# Altium PCB S24.pcbdoc
Units mil, origin at the board's own origin, x right, y up, seen from the top; angles counter-clockwise.
Board outline 2019.84 x 1784.84 mil, 2 copper layers (Top Layer, Bottom Layer); 2 components, 5 nets, 65 pads, 0 vias.
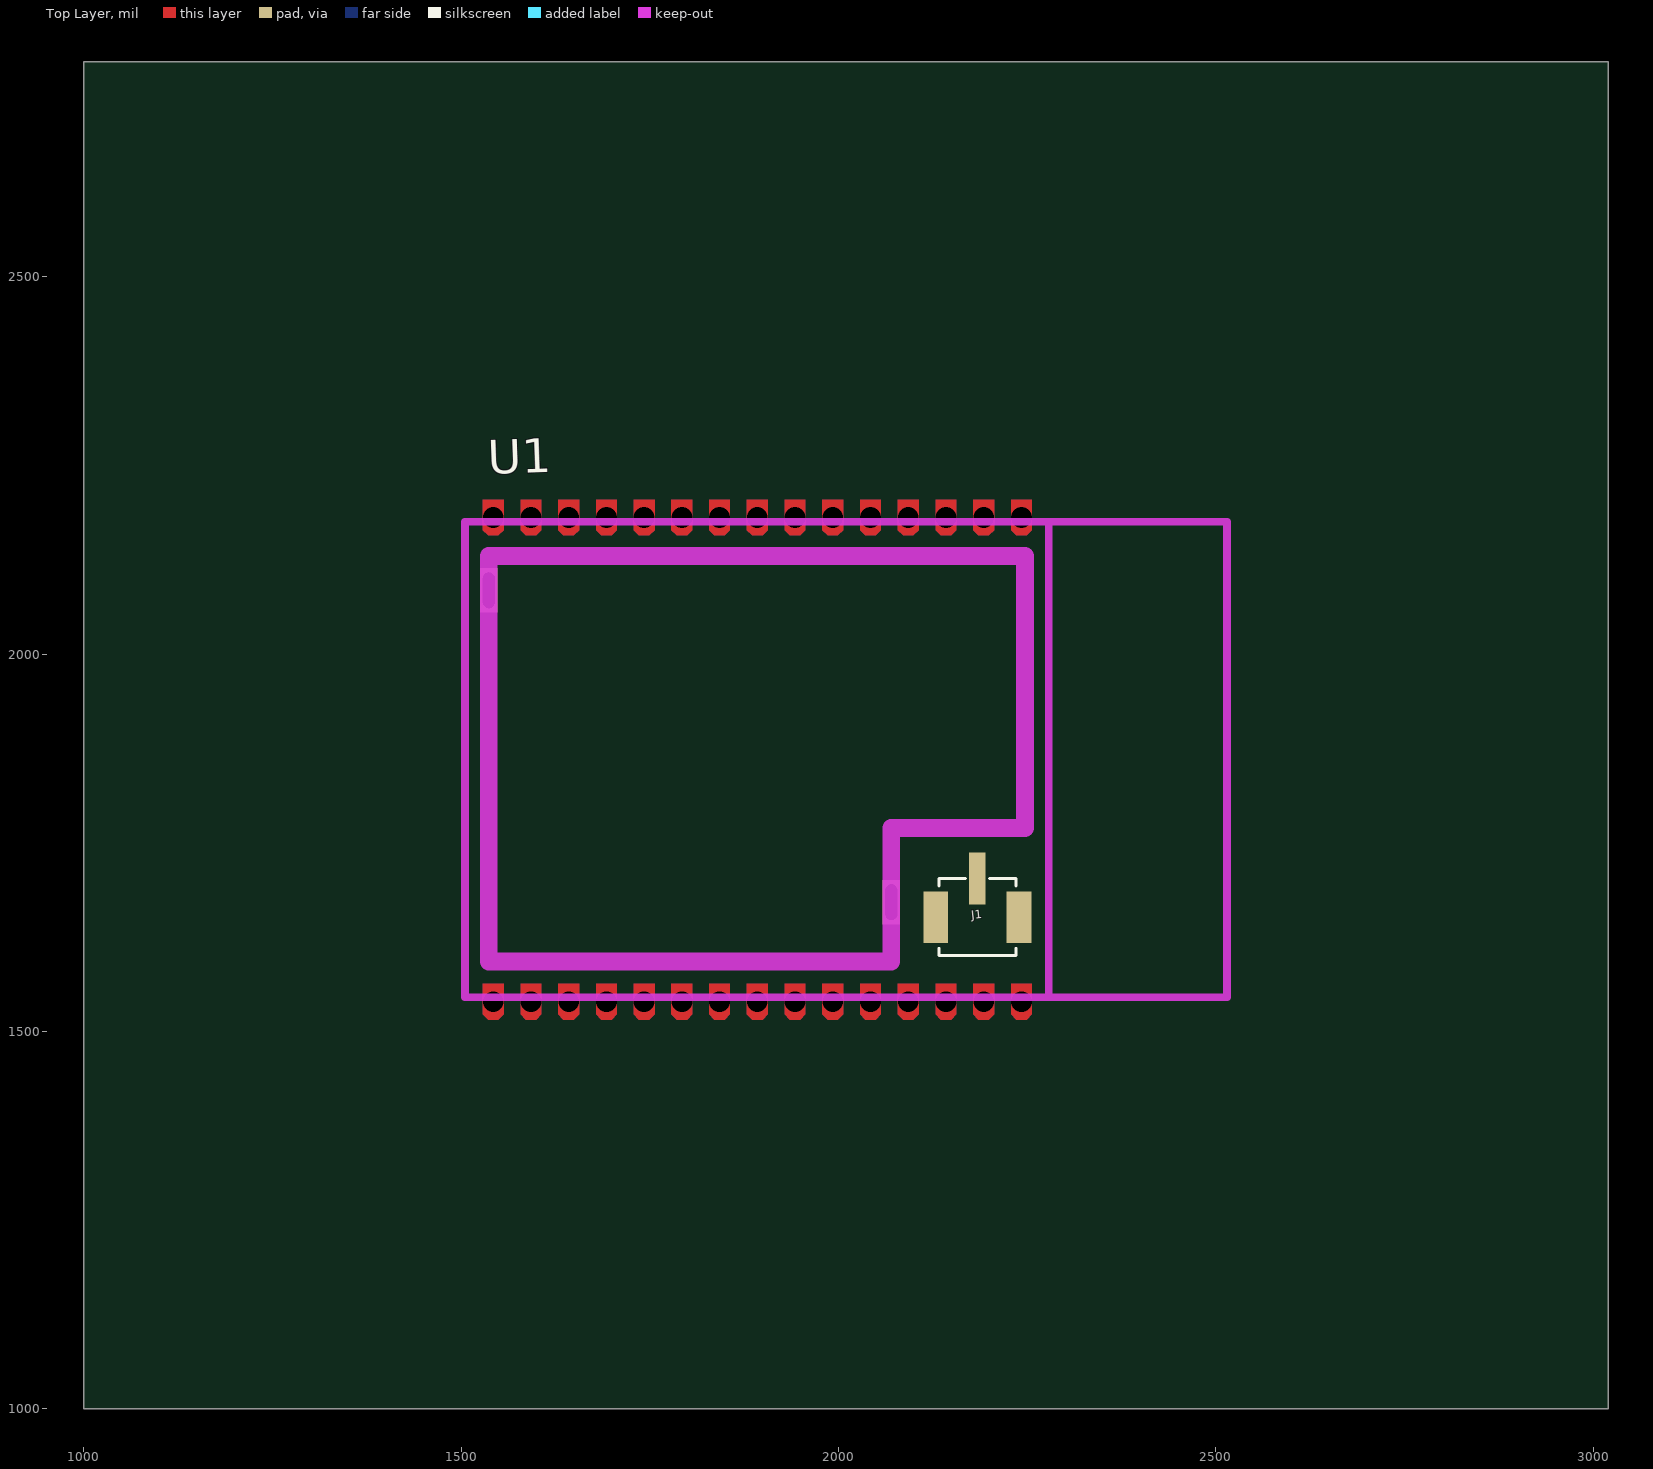
[diagram p0: Top Layer view]
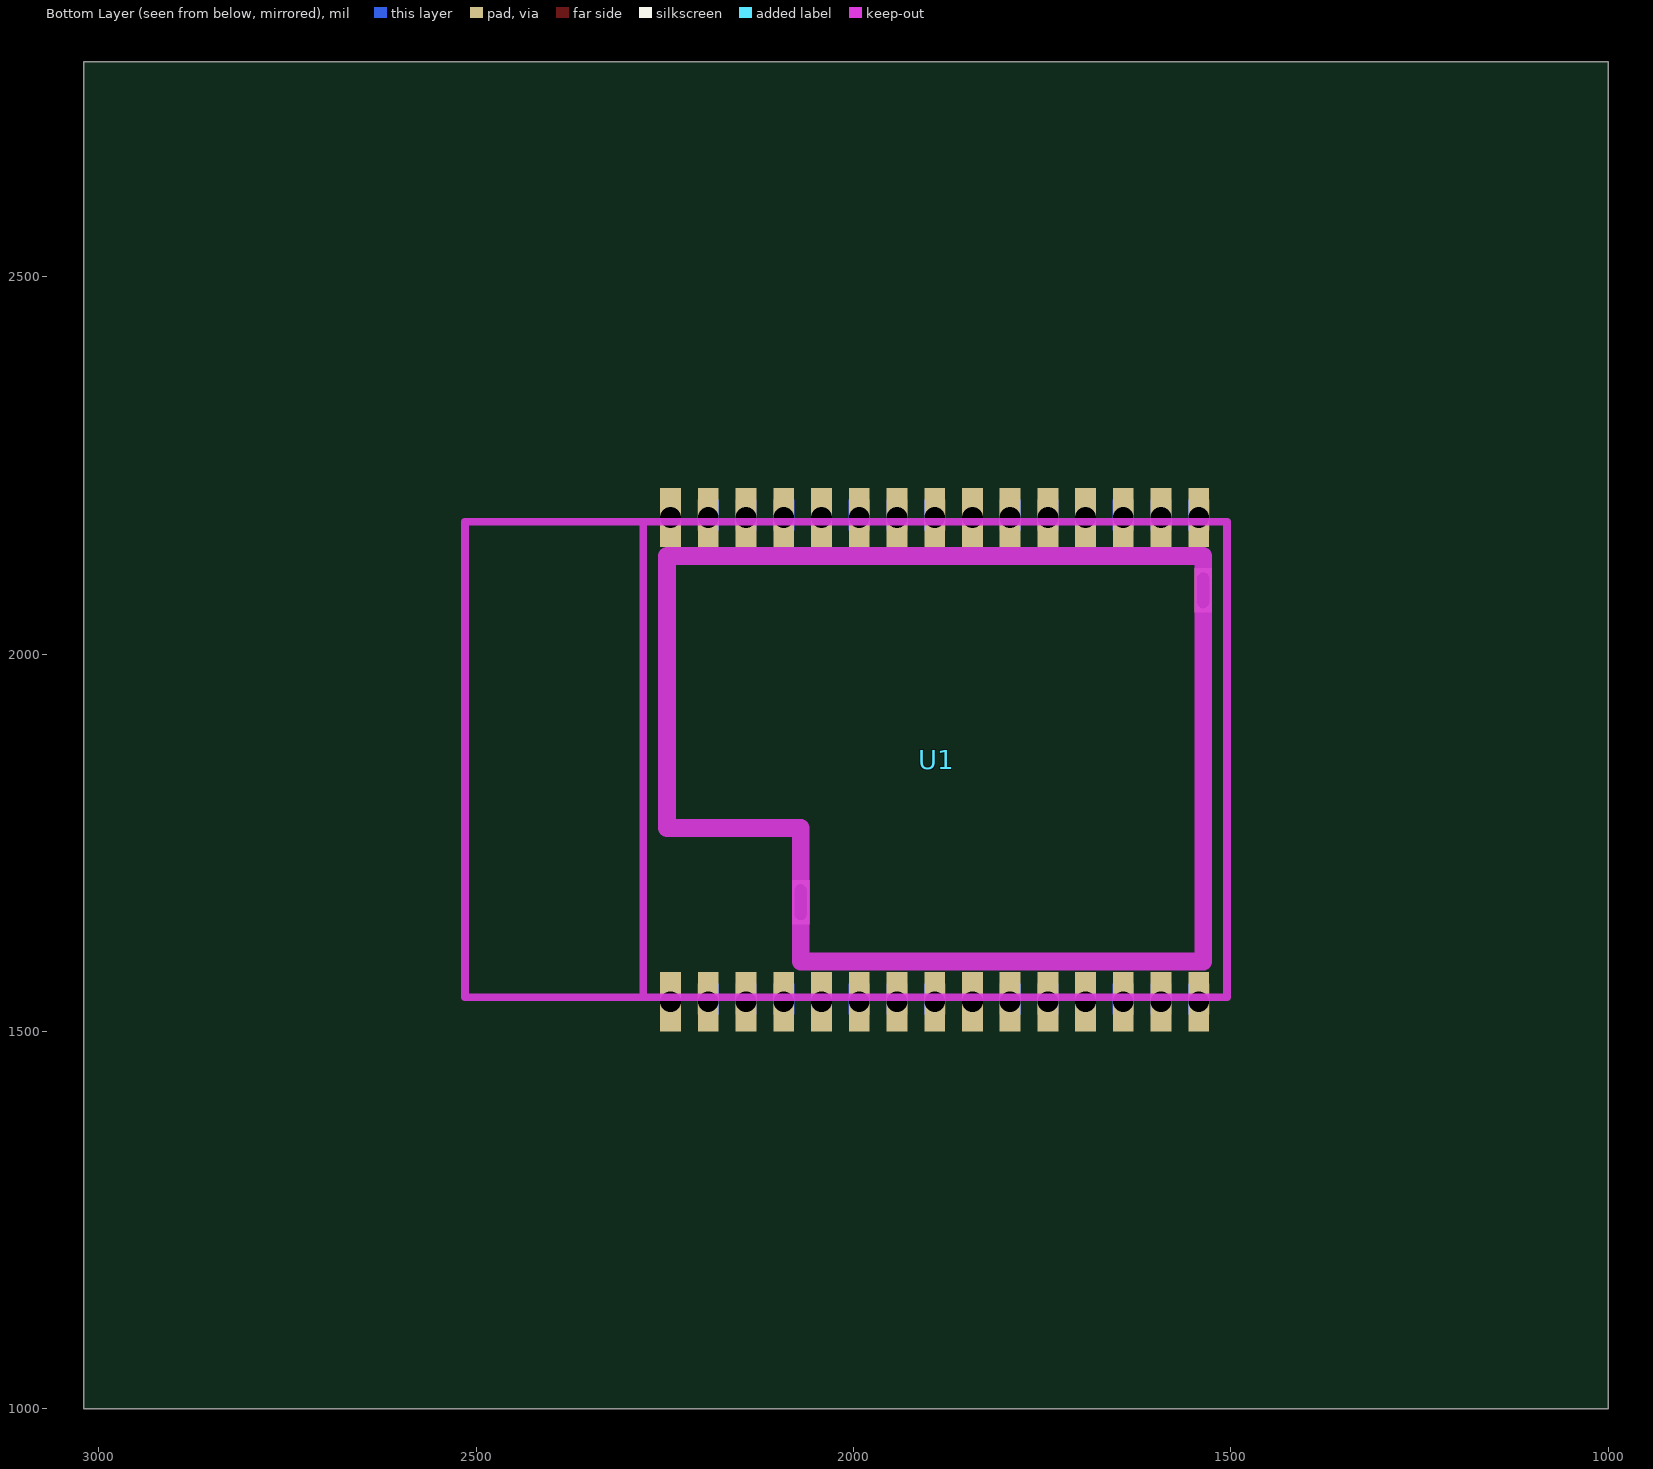
[diagram p1: Bottom Layer view, seen from below]

## Layer stack, top to bottom
Top Layer: signal copper (thickness not stored)
Dielectric: dielectric 12.6, FR-4, Dk 4.8
Bottom Layer: signal copper (thickness not stored)

## Board outline
3019.84,1000 1000,1000 1000,2784.84 3019.84,2784.84

## Components (designator, comment, footprint, x,y, rotation, side; value= is the part's Value field where it differs from the comment)
J1 "ANT" IPEX 2184.13,1702.76 r0 top
U1 "S24-2020.4.1" S24-2020.4.1 1505,1545.28 r0 top

## Footprints (in the part's own frame and the unit in brackets; to place one, negate y for a bottom-side part, rotate by r counter-clockwise, add the part's x,y. Pads: shape width x height; smd on the part's side, far side on the other; paste and mask are expansions set on the pad)
IPEX [mil]
  rect 32.74x68.17 smd: 0(-55.11,-51.18)
  rect 32.73x68.17 smd: 0(55.12,-51.18)
  rect 21.83x69.07 smd: 1(0,0)
  silkscreen extent -51,-102 51,0
S24-2020.4.1 [mm]
  rect 0.6x1.5 hole 0.4 slot 1.2 at 90 deg: 0(0.8,13.7) 0(14.35,3.2)
  rect 0.7x2 smd far side: 1(0.95,-0.15) 2(2.22,-0.15) 3(3.49,-0.15) 4(4.76,-0.15) 5(6.03,-0.15) 6(7.3,-0.15) 7(8.57,-0.15) 8(9.84,-0.15) 9(11.11,-0.15) 10(12.38,-0.15) 11(13.65,-0.15) 12(14.92,-0.15) 13(16.19,-0.15) 14(17.46,-0.15) 15(18.73,-0.15) 16(18.73,16.15) 17(17.46,16.15) 18(16.19,16.15) 19(14.92,16.15) 20(13.65,16.15) 21(12.38,16.15) 22(11.11,16.15) 23(9.84,16.15) 24(8.57,16.15) 25(7.3,16.15) 26(6.03,16.15) 27(4.76,16.15) 28(3.49,16.15) 29(2.22,16.15) 30(0.95,16.15)
  round 0 hole 0.7: 1(0.95,-0.15) 2(2.22,-0.15) 3(3.49,-0.15) 4(4.76,-0.15) 5(6.03,-0.15) 6(7.3,-0.15) 7(8.57,-0.15) 8(9.84,-0.15) 9(11.11,-0.15) 10(12.38,-0.15) 11(13.65,-0.15) 12(14.92,-0.15) 13(16.19,-0.15) 14(17.46,-0.15) 15(18.73,-0.15) 16(18.73,16.15) 17(17.46,16.15) 18(16.19,16.15) 19(14.92,16.15) 20(13.65,16.15) 21(12.38,16.15) 22(11.11,16.15) 23(9.84,16.15) 24(8.57,16.15) 25(7.3,16.15) 26(6.03,16.15) 27(4.76,16.15) 28(3.49,16.15) 29(2.22,16.15) 30(0.95,16.15)
  Top Layer region: 1.3,0.45 1.3,-0.575 1.125,-0.75 0.775,-0.75 0.6,-0.575 0.6,0.45 0.775,0.45 1.125,0.45
  Top Layer region: 2.57,0.45 2.57,-0.575 2.395,-0.75 2.045,-0.75 1.87,-0.575 1.87,0.45 2.045,0.45 2.395,0.45
  Top Layer region: 3.84,0.45 3.84,-0.575 3.665,-0.75 3.315,-0.75 3.14,-0.575 3.14,0.45 3.315,0.45 3.665,0.45
  Top Layer region: 5.11,0.45 5.11,-0.575 4.935,-0.75 4.585,-0.75 4.41,-0.575 4.41,0.45 4.585,0.45 4.935,0.45
  Top Layer region: 6.38,0.45 6.38,-0.575 6.205,-0.75 5.855,-0.75 5.68,-0.575 5.68,0.45 5.855,0.45 6.205,0.45
  Top Layer region: 7.65,0.45 7.65,-0.575 7.475,-0.75 7.125,-0.75 6.95,-0.575 6.95,0.45 7.125,0.45 7.475,0.45
  Top Layer region: 8.92,0.45 8.92,-0.575 8.745,-0.75 8.395,-0.75 8.22,-0.575 8.22,0.45 8.395,0.45 8.745,0.45
  Top Layer region: 10.19,0.45 10.19,-0.575 10.015,-0.75 9.665,-0.75 9.49,-0.575 9.49,0.45 9.665,0.45 10.015,0.45
  Top Layer region: 11.46,0.45 11.46,-0.575 11.285,-0.75 10.935,-0.75 10.76,-0.575 10.76,0.45 10.935,0.45 11.285,0.45
  Top Layer region: 12.73,0.45 12.73,-0.575 12.555,-0.75 12.205,-0.75 12.03,-0.575 12.03,0.45 12.205,0.45 12.555,0.45
  Top Layer region: 14,0.45 14,-0.575 13.825,-0.75 13.475,-0.75 13.3,-0.575 13.3,0.45 13.475,0.45 13.825,0.45
  Top Layer region: 15.27,0.45 15.27,-0.575 15.095,-0.75 14.745,-0.75 14.57,-0.575 14.57,0.45 14.745,0.45 15.095,0.45
  Top Layer region: 16.54,0.45 16.54,-0.575 16.365,-0.75 16.015,-0.75 15.84,-0.575 15.84,0.45 16.015,0.45 16.365,0.45
  Top Layer region: 17.81,0.45 17.81,-0.575 17.635,-0.75 17.285,-0.75 17.11,-0.575 17.11,0.45 17.285,0.45 17.635,0.45
  Top Layer region: 19.08,0.45 19.08,-0.575 18.905,-0.75 18.555,-0.75 18.38,-0.575 18.38,0.45 18.555,0.45 18.905,0.45
  Top Layer region: 1.3,16.75 1.3,15.725 1.125,15.55 0.775,15.55 0.6,15.725 0.6,16.75 0.775,16.75 1.125,16.75
  Top Layer region: 2.57,16.75 2.57,15.725 2.395,15.55 2.045,15.55 1.87,15.725 1.87,16.75 2.045,16.75 2.395,16.75
  Top Layer region: 3.84,16.75 3.84,15.725 3.665,15.55 3.315,15.55 3.14,15.725 3.14,16.75 3.315,16.75 3.665,16.75
  Top Layer region: 5.11,16.75 5.11,15.725 4.935,15.55 4.585,15.55 4.41,15.725 4.41,16.75 4.585,16.75 4.935,16.75
  Top Layer region: 6.38,16.75 6.38,15.725 6.205,15.55 5.855,15.55 5.68,15.725 5.68,16.75 5.855,16.75 6.205,16.75
  Top Layer region: 7.65,16.75 7.65,15.725 7.475,15.55 7.125,15.55 6.95,15.725 6.95,16.75 7.125,16.75 7.475,16.75
  Top Layer region: 8.92,16.75 8.92,15.725 8.745,15.55 8.395,15.55 8.22,15.725 8.22,16.75 8.395,16.75 8.745,16.75
  Top Layer region: 10.19,16.75 10.19,15.725 10.015,15.55 9.665,15.55 9.49,15.725 9.49,16.75 9.665,16.75 10.015,16.75
  Top Layer region: 11.46,16.75 11.46,15.725 11.285,15.55 10.935,15.55 10.76,15.725 10.76,16.75 10.935,16.75 11.285,16.75
  Top Layer region: 12.73,16.75 12.73,15.725 12.555,15.55 12.205,15.55 12.03,15.725 12.03,16.75 12.205,16.75 12.555,16.75
  Top Layer region: 14,16.75 14,15.725 13.825,15.55 13.475,15.55 13.3,15.725 13.3,16.75 13.475,16.75 13.825,16.75
  Top Layer region: 15.27,16.75 15.27,15.725 15.095,15.55 14.745,15.55 14.57,15.725 14.57,16.75 14.745,16.75 15.095,16.75
  Top Layer region: 16.54,16.75 16.54,15.725 16.365,15.55 16.015,15.55 15.84,15.725 15.84,16.75 16.015,16.75 16.365,16.75
  Top Layer region: 17.81,16.75 17.81,15.725 17.635,15.55 17.285,15.55 17.11,15.725 17.11,16.75 17.285,16.75 17.635,16.75
  Top Layer region: 19.08,16.75 19.08,15.725 18.905,15.55 18.555,15.55 18.38,15.725 18.38,16.75 18.555,16.75 18.905,16.75
  Bottom Layer region: 1.3,0.45 1.3,-0.575 1.125,-0.75 0.775,-0.75 0.6,-0.575 0.6,0.45 0.775,0.45 1.125,0.45
  Bottom Layer region: 2.57,0.45 2.57,-0.575 2.395,-0.75 2.045,-0.75 1.87,-0.575 1.87,0.45 2.045,0.45 2.395,0.45
  Bottom Layer region: 3.84,0.45 3.84,-0.575 3.665,-0.75 3.315,-0.75 3.14,-0.575 3.14,0.45 3.315,0.45 3.665,0.45
  Bottom Layer region: 5.11,0.45 5.11,-0.575 4.935,-0.75 4.585,-0.75 4.41,-0.575 4.41,0.45 4.585,0.45 4.935,0.45
  Bottom Layer region: 6.38,0.45 6.38,-0.575 6.205,-0.75 5.855,-0.75 5.68,-0.575 5.68,0.45 5.855,0.45 6.205,0.45
  Bottom Layer region: 7.65,0.45 7.65,-0.575 7.475,-0.75 7.125,-0.75 6.95,-0.575 6.95,0.45 7.125,0.45 7.475,0.45
  Bottom Layer region: 8.92,0.45 8.92,-0.575 8.745,-0.75 8.395,-0.75 8.22,-0.575 8.22,0.45 8.395,0.45 8.745,0.45
  Bottom Layer region: 10.19,0.45 10.19,-0.575 10.015,-0.75 9.665,-0.75 9.49,-0.575 9.49,0.45 9.665,0.45 10.015,0.45
  Bottom Layer region: 11.46,0.45 11.46,-0.575 11.285,-0.75 10.935,-0.75 10.76,-0.575 10.76,0.45 10.935,0.45 11.285,0.45
  Bottom Layer region: 12.73,0.45 12.73,-0.575 12.555,-0.75 12.205,-0.75 12.03,-0.575 12.03,0.45 12.205,0.45 12.555,0.45
  Bottom Layer region: 14,0.45 14,-0.575 13.825,-0.75 13.475,-0.75 13.3,-0.575 13.3,0.45 13.475,0.45 13.825,0.45
  Bottom Layer region: 15.27,0.45 15.27,-0.575 15.095,-0.75 14.745,-0.75 14.57,-0.575 14.57,0.45 14.745,0.45 15.095,0.45
  Bottom Layer region: 16.54,0.45 16.54,-0.575 16.365,-0.75 16.015,-0.75 15.84,-0.575 15.84,0.45 16.015,0.45 16.365,0.45
  Bottom Layer region: 17.81,0.45 17.81,-0.575 17.635,-0.75 17.285,-0.75 17.11,-0.575 17.11,0.45 17.285,0.45 17.635,0.45
  Bottom Layer region: 19.08,0.45 19.08,-0.575 18.905,-0.75 18.555,-0.75 18.38,-0.575 18.38,0.45 18.555,0.45 18.905,0.45
  Bottom Layer region: 1.3,16.75 1.3,15.725 1.125,15.55 0.775,15.55 0.6,15.725 0.6,16.75 0.775,16.75 1.125,16.75
  Bottom Layer region: 2.57,16.75 2.57,15.725 2.395,15.55 2.045,15.55 1.87,15.725 1.87,16.75 2.045,16.75 2.395,16.75
  Bottom Layer region: 3.84,16.75 3.84,15.725 3.665,15.55 3.315,15.55 3.14,15.725 3.14,16.75 3.315,16.75 3.665,16.75
  Bottom Layer region: 5.11,16.75 5.11,15.725 4.935,15.55 4.585,15.55 4.41,15.725 4.41,16.75 4.585,16.75 4.935,16.75
  Bottom Layer region: 6.38,16.75 6.38,15.725 6.205,15.55 5.855,15.55 5.68,15.725 5.68,16.75 5.855,16.75 6.205,16.75
  Bottom Layer region: 7.65,16.75 7.65,15.725 7.475,15.55 7.125,15.55 6.95,15.725 6.95,16.75 7.125,16.75 7.475,16.75
  Bottom Layer region: 8.92,16.75 8.92,15.725 8.745,15.55 8.395,15.55 8.22,15.725 8.22,16.75 8.395,16.75 8.745,16.75
  Bottom Layer region: 10.19,16.75 10.19,15.725 10.015,15.55 9.665,15.55 9.49,15.725 9.49,16.75 9.665,16.75 10.015,16.75
  Bottom Layer region: 11.46,16.75 11.46,15.725 11.285,15.55 10.935,15.55 10.76,15.725 10.76,16.75 10.935,16.75 11.285,16.75
  Bottom Layer region: 12.73,16.75 12.73,15.725 12.555,15.55 12.205,15.55 12.03,15.725 12.03,16.75 12.205,16.75 12.555,16.75
  Bottom Layer region: 14,16.75 14,15.725 13.825,15.55 13.475,15.55 13.3,15.725 13.3,16.75 13.475,16.75 13.825,16.75
  Bottom Layer region: 15.27,16.75 15.27,15.725 15.095,15.55 14.745,15.55 14.57,15.725 14.57,16.75 14.745,16.75 15.095,16.75
  Bottom Layer region: 16.54,16.75 16.54,15.725 16.365,15.55 16.015,15.55 15.84,15.725 15.84,16.75 16.015,16.75 16.365,16.75
  Bottom Layer region: 17.81,16.75 17.81,15.725 17.635,15.55 17.285,15.55 17.11,15.725 17.11,16.75 17.285,16.75 17.635,16.75
  Bottom Layer region: 19.08,16.75 19.08,15.725 18.905,15.55 18.555,15.55 18.38,15.725 18.38,16.75 18.555,16.75 18.905,16.75
  Keep-Out Layer lines w0.254: 0,0 0,16 19.65,16 19.65,0 0,0
  Keep-Out Layer lines w0.6: 0.8,14.8 0.8,1.2 14.35,1.2 14.35,5.7 18.85,5.7 18.85,14.8 ; 0.8,14.85 18.85,14.85

## Nets (pads, with @x,y where several pads share a name; then routed paths per layer and width w, separated by ;. In a path a pad name is that pad's centre, name@x,y a point inside that pad or via, vN(x,y) a via of type N, cw(c..) or ccw(c..) an arc to the next point about the centre after c; other vN are vias at no path point)
ANT: J1.1
GND: J1.0
S$1011: 
S$1013: 
S$1015: 
pads on no net: U1.0 U1.1 U1.2 U1.3 U1.4 U1.5 U1.6 U1.7 U1.8 U1.9 U1.10 U1.11 U1.12 U1.13 U1.14 U1.15 U1.16 U1.17 U1.18 U1.19 U1.20 U1.21 U1.22 U1.23 U1.24 U1.25 U1.26 U1.27 U1.28 U1.29 U1.30

## Silkscreen, mask and mechanical layers (free items; w line width, h text height)
Document:
  lines w0.1: 2008.92,1891.42 2010.92,1893.42